# EAGLE board untitled (EAGLE 5.04)
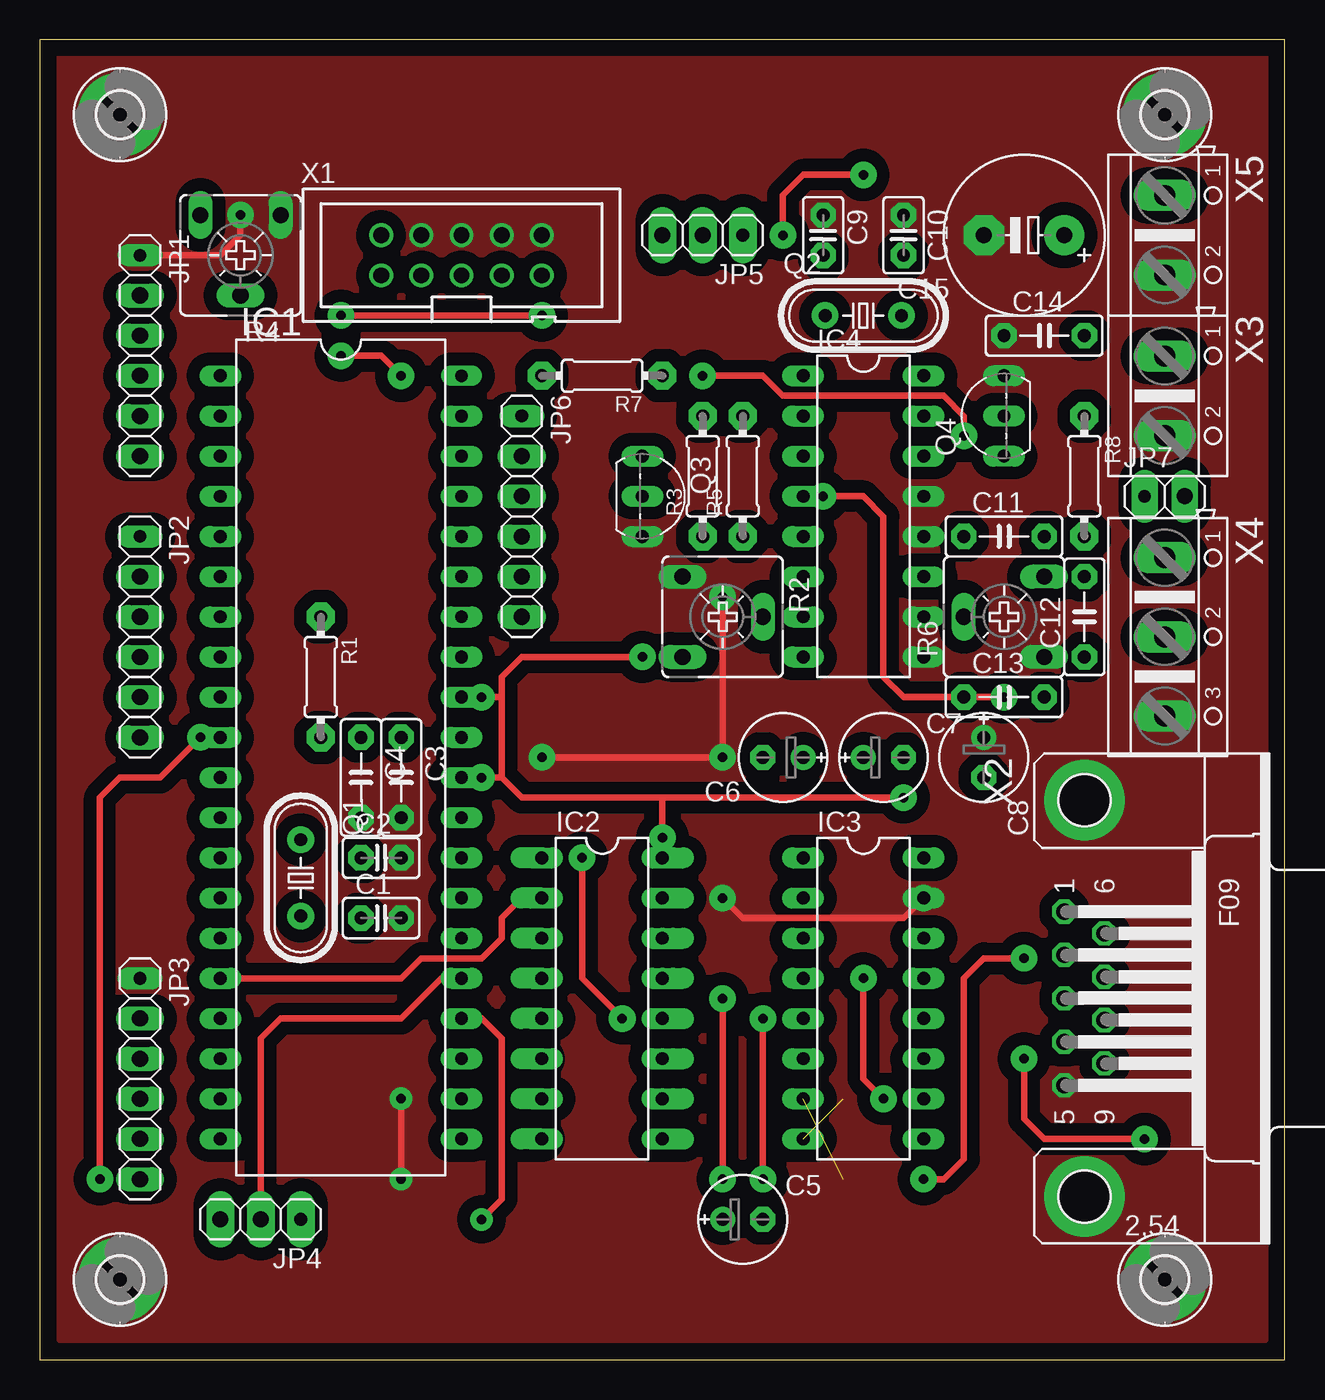
[diagram p0: board, top side]
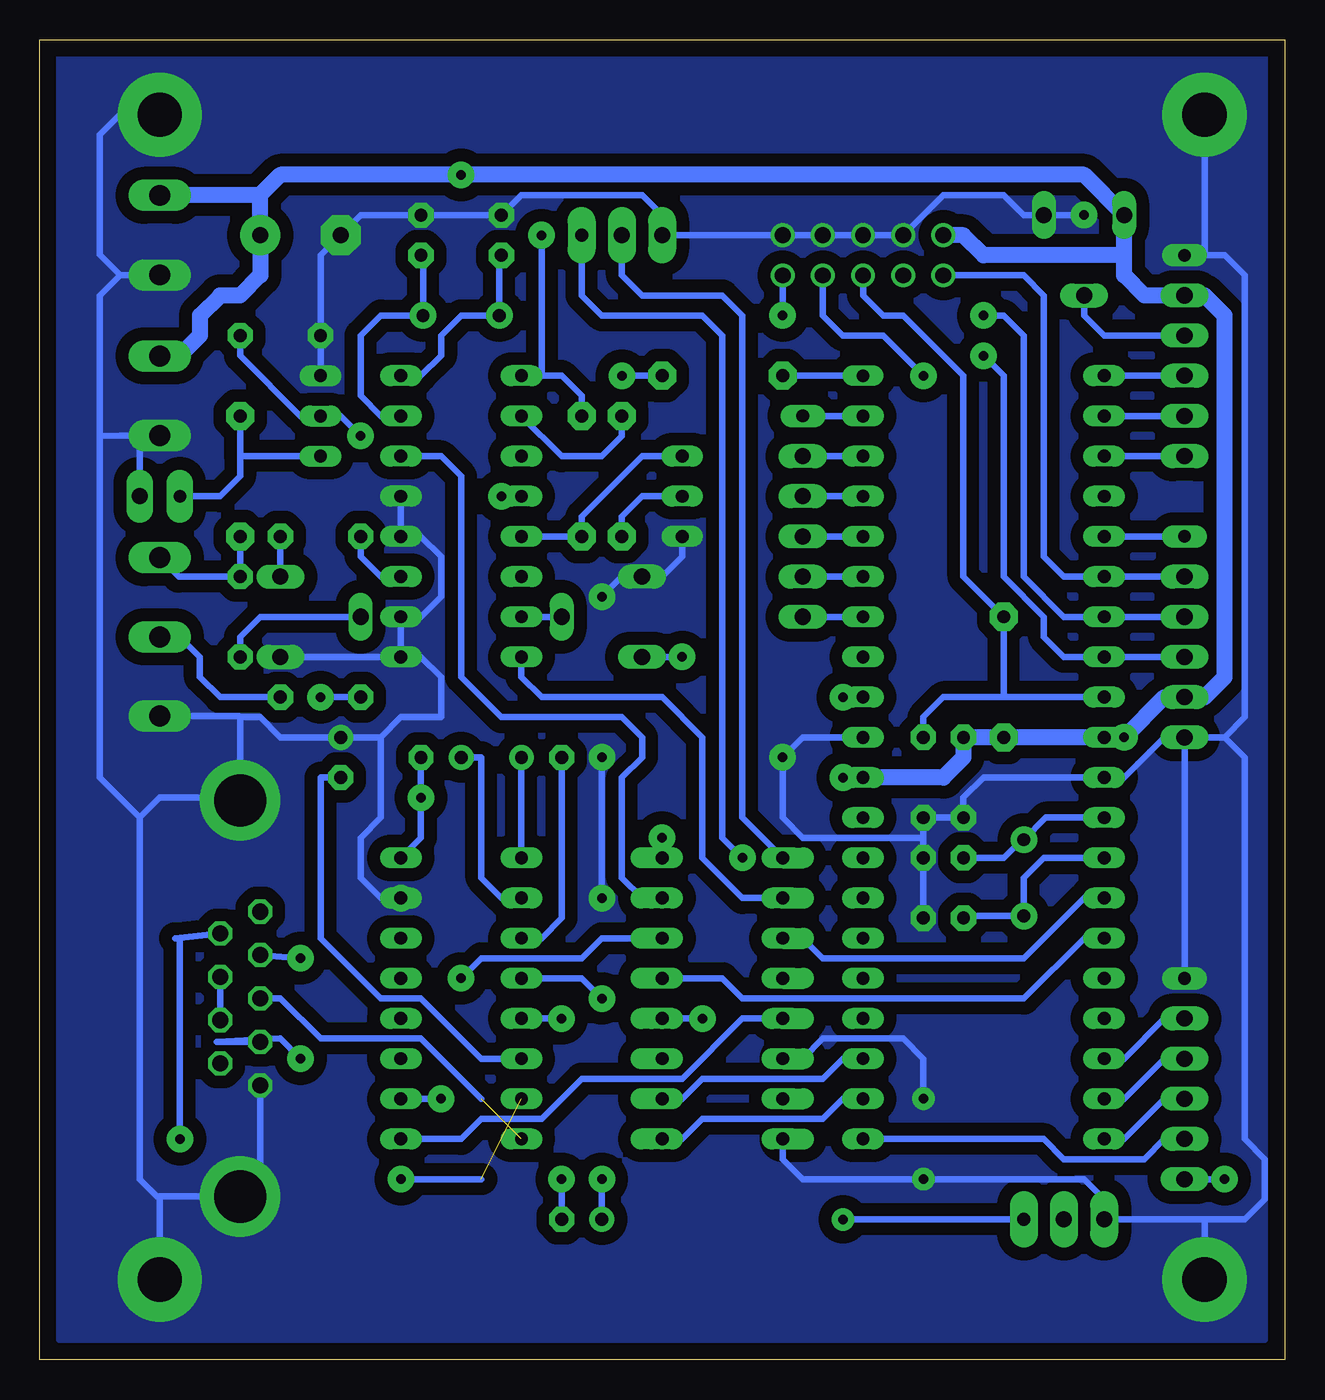
[diagram p1: board, bottom side, seen from below]

Size 78.72 x 83.49 mm. Coordinates in mm from the lower left corner, seen from the top.
Outline: 0,0 78.72,0 78.72,83.49 0,83.49 0,0
Copper layers (1*16): Top 0.035mm / dielectric 1.5mm / Bottom 0.035mm
Design rules "default": minimum track width 10mil, minimum drill 24mil, track to track 8mil, track to pad 8mil, pad to pad 8mil, via to via 8mil, smd to smd 8mil, copper to edge 40mil, drill to drill 8mil, minimum pad ring 10mil, minimum via ring 8mil, stop-mask expansion 4mil, vias tented up to drill 0mil, thermal gap 10mil

## Footprints (pad centres in the part's own frame; a part is rotated, then mirrored left to right if it is on the bottom)
C2.5-2 = drill 0.813 pad 1.6 octagon: 1 -1.27,0; 2 1.27,0
C5B2.5 = drill 0.813 pad 1.6 octagon: 1 -2.54,0; 2 2.54,0
E2,5-6E = drill 0.813 pad 1.575 round: + -1.27,0 | drill 0.813 pad 1.575 octagon: - 1.27,0
E5-10,5 = drill 1.016 pad 2.54 round: + -2.54,0 | drill 1.016 pad 2.54 octagon: - 2.54,0
2,8-PAD = drill 2.8 pad 5.334 round: B2,8 0,0
DIL40 = drill 0.813 long: 1 -24.13,-7.62; 2 -21.59,-7.62; 3 -19.05,-7.62; 4 -16.51,-7.62; 5 -13.97,-7.62; 6 -11.43,-7.62; 7 -8.89,-7.62; 8 -6.35,-7.62; 9 -3.81,-7.62; 10 -1.27,-7.62; 11 1.27,-7.62; 12 3.81,-7.62; 13 6.35,-7.62; 14 8.89,-7.62; 15 11.43,-7.62; 16 13.97,-7.62; 17 16.51,-7.62; 18 19.05,-7.62; 19 21.59,-7.62; 20 24.13,-7.62; 21 24.13,7.62; 22 21.59,7.62; 23 19.05,7.62; 24 16.51,7.62; 25 13.97,7.62; 26 11.43,7.62; 27 8.89,7.62; 28 6.35,7.62; 29 3.81,7.62; 30 1.27,7.62; 31 -1.27,7.62; 32 -3.81,7.62; 33 -6.35,7.62; 34 -8.89,7.62; 35 -11.43,7.62; 36 -13.97,7.62; 37 -16.51,7.62; 38 -19.05,7.62; 39 -21.59,7.62; 50 1.27,7.62 | drill 0.8 pad 1.27 long: 40 -24.13,7.62 | drill 0.813 pad 1.27 long: 41 -21.59,7.62; 42 -19.05,7.62; 43 -16.51,7.62; 44 -13.97,7.62; 45 -11.43,7.62; 46 -8.89,7.62; 47 -6.35,7.62; 48 -3.81,7.62; 49 -1.27,7.62; 51 1.27,7.62; 52 3.81,7.62; 53 6.35,7.62; 54 8.89,7.62; 55 11.43,7.62; 56 13.97,7.62; 57 16.51,7.62; 58 19.05,7.62; 59 21.59,7.62; 60 24.13,7.62; 61 -24.13,-7.62; 62 -21.59,-7.62; 63 -19.05,-7.62; 64 -16.51,-7.62; 65 -13.97,-7.62; 66 -11.43,-7.62; 67 -8.89,-7.62; 68 -6.35,-7.62; 69 -3.81,-7.62; 70 -1.27,-7.62; 71 1.27,-7.62; 72 3.81,-7.62; 73 6.35,-7.62; 74 8.89,-7.62; 75 11.43,-7.62; 76 13.97,-7.62; 77 16.51,-7.62; 78 19.05,-7.62; 79 21.59,-7.62; 80 24.13,-7.62; 81 24.13,-7.62
DIL16 = drill 0.813 long: 1 -8.89,-3.81; 2 -6.35,-3.81; 3 -3.81,-3.81; 4 -1.27,-3.81; 5 1.27,-3.81; 6 3.81,-3.81; 7 6.35,-3.81; 8 8.89,-3.81; 9 8.89,3.81; 10 6.35,3.81; 11 3.81,3.81; 12 1.27,3.81; 13 -1.27,3.81; 14 -3.81,3.81; 15 -6.35,3.81; 32 -8.89,3.81 | drill 0.813 offset: 16 -8.89,3.81; 17 -6.35,3.81; 18 -3.81,3.81; 19 -1.27,3.81; 20 1.27,3.81; 21 3.81,3.81; 22 6.35,3.81; 23 8.89,3.81; 24 8.89,-3.81; 25 8.89,-3.81; 26 6.35,-3.81; 27 3.81,-3.81; 28 1.27,-3.81; 29 -1.27,-3.81; 30 -3.81,-3.81; 31 -6.35,-3.81; 33 -8.89,-3.81
DIL16' = drill 0.813 long: 1 -8.89,-3.81; 2 -6.35,-3.81; 3 -3.81,-3.81; 4 -1.27,-3.81; 5 1.27,-3.81; 6 3.81,-3.81; 7 6.35,-3.81; 8 8.89,-3.81; 9 8.89,3.81; 10 6.35,3.81; 11 3.81,3.81; 12 1.27,3.81; 13 -1.27,3.81; 14 -3.81,3.81; 15 -6.35,3.81; 16 -8.89,3.81
1X06 = drill 0.8 pad 1.422 long: 1 -6.35,0; 7 -3.81,0; 8 -1.27,0; 9 1.27,0; 10 3.81,0; 11 6.35,0 | drill 1.016 long: 2 -3.81,0; 3 -1.27,0; 4 1.27,0; 5 3.81,0; 6 6.35,0
1X03 = drill 0.8 pad 1.778 long: 1 -2.54,0; 4 0,0; 5 2.54,0 | drill 1.016 long: 2 0,0; 3 2.54,0
1X02 = drill 0.8 pad 1.676 long: 1 -1.27,0; 3 1.27,0 | drill 1.016 long: 2 1.27,0
HC49/S = drill 0.813 pad 1.676 round: 1 -2.413,0; 2 2.413,0
TO92-EBC = drill 0.813 long: B 0,-1.27; C -2.54,-1.27; E 2.54,-1.27
0204/7 = drill 0.813 pad 1.778 octagon: 1 -3.81,0; 2 3.81,0
CA6V = drill 1.016 long: A -2.54,-2.54; E 2.54,-2.54; S 0,2.54
PAK100/2500-10 = drill 1 pad 1.422 round: 1 -5.08,-1.27; 2 -5.08,1.27; 3 -2.54,-1.27; 4 -2.54,1.27; 5 0,-1.27; 6 0,1.27; 7 2.54,-1.27; 8 2.54,1.27; 9 5.08,-1.27; 10 5.08,1.27
F09HP = drill 1.016 octagon: 1 -5.486,-1.27; 2 -2.743,-1.27; 3 0,-1.27; 4 2.743,-1.27; 5 5.486,-1.27; 6 -4.115,1.27; 7 -1.372,1.27; 8 1.372,1.27; 9 4.115,1.27 | drill 3.302 pad 5.08 round: G1 -12.522,0; G2 12.522,0
AK500/2 = drill 1.321 long: 1 -2.515,0; 2 2.515,0
AK500/3 = drill 1.321 long: 1 -5.004,0; 2 0,0; 3 5.004,0

## Placement (x,y rotation side)
C1  22p  [C2.5-2]  21.59,27.94 0 top
C2  22p  [C2.5-2]  21.59,31.75 0 top
C3  100n  [C5B2.5]  22.86,36.83 270 top
C4  100n  [C5B2.5]  20.32,36.83 270 top
C5  1u  [E2,5-6E]  44.45,8.89 0 top
C6  1u  [E2,5-6E]  46.99,38.1 180 top
C7  1u  [E2,5-6E]  53.34,38.1 0 top
C8  1u  [E2,5-6E]  59.69,38.1 270 top
C9  22p  [C2.5-2]  49.53,71.12 270 top
C10  22p  [C2.5-2]  54.61,71.12 270 top
C11  100n  [C5B2.5]  60.96,52.07 0 top
C12  100n  [C5B2.5]  66.04,46.99 90 top
C13  100n  [C5B2.5]  60.96,41.91 0 top
C14  100n  [C5B2.5]  63.5,64.77 0 top
C15  2200u  [E5-10,5]  62.23,71.12 180 top
H5  MOUNT-PAD-ROUND2.8  [2,8-PAD]  5.08,5.08 0 top
H6  MOUNT-PAD-ROUND2.8  [2,8-PAD]  71.12,5.08 0 top
H7  MOUNT-PAD-ROUND2.8  [2,8-PAD]  71.12,78.74 0 top
H8  MOUNT-PAD-ROUND2.8  [2,8-PAD]  5.08,78.74 0 top
IC1  MEGA32-P  [DIL40]  19.05,38.1 270 top
IC2  4052N  [DIL16]  35.56,22.86 270 top
IC3  MAX232  [DIL16']  52.07,22.86 270 top
IC4  [DIL16']  52.07,53.34 270 top
JP1  LCD_1  [1X06]  6.35,63.5 270 top
JP2  LCD_2  [1X06]  6.35,45.72 270 top
JP3  tombol_ext  [1X06]  6.35,17.78 270 top
JP4  ind_ext  [1X03]  13.97,8.89 180 top
JP5  USART_ext  [1X03]  41.91,71.12 180 top
JP6  sensor  [1X06]  30.48,53.34 270 top
JP7  [1X02]  71.12,54.61 0 top
Q1  11.0592  [HC49/S]  16.51,30.48 270 top
Q2  4,43  [HC49/S]  52.07,66.04 0 top
Q3  BC548  [TO92-EBC]  39.37,54.61 270 top
Q4  BC548  [TO92-EBC]  59.69,59.69 90 top
R1  10k  [0204/7]  17.78,43.18 270 top
R2  10k  [CA6V]  43.18,46.99 270 top
R3  10k  [0204/7]  41.91,55.88 90 top
R4  10k  [CA6V]  12.7,69.85 180 top
R5  10k  [0204/7]  44.45,55.88 90 top
R6  10k  [CA6V]  60.96,46.99 90 top
R7  10k  [0204/7]  35.56,62.23 180 top
R8  10k  [0204/7]  66.04,55.88 270 top
X1  ISP_port  [PAK100/2500-10]  26.67,69.85 0 top
X2  RS_232  [F09HP]  66.04,22.86 270 top
X3  [AK500/2]  71.12,60.96 270 top
X4  [AK500/3]  71.12,45.72 270 top
X5  [AK500/2]  71.12,71.12 270 top

## Library data of the parts
C1-C4 C9-C14 = capacitor-wima
C5-C8 C15 R1 R3 R5 R7 R8 = resistor
H5-H8 = holes
IC1 = atmel
IC2 = 40xx
IC3 = maxim
IC4 = ic-package
JP1-JP7 = pinhead
Q1 Q2 = crystal
Q3 Q4 = transistor-npn
R2 R4 R6 = pot
X1 = con-3m
X2 = con-subd
X3-X5 = con-ptr500

## Nets
!RST: C3.1 IC1.9 R1.1 X1.5
ADC0: IC1.39 JP6.1
ADC1: IC1.38 JP6.2
ADC2: IC1.37 JP6.3
ADC3: IC1.36 JP6.4
ADC4: IC1.35 JP6.5
ADC5: IC1.34 JP6.6
CONTR: JP1.3 R4.S
GND: C1.2 C2.2 C3.2 C4.2 C8.+ C9.1 C10.1 C14.1 C15.- H5.B2,8 H6.B2,8 H7.B2,8 H8.B2,8 IC1.11 IC1.31 IC2.6 IC2.8 IC3.15 IC4.9 IC4.10 IC4.12 IC4.13 JP1.1 JP2.6 JP3.1 JP4.3 JP5.3 JP7.2 Q3.E Q4.E R2.A R4.A R6.A X1.4 X1.6 X1.8 X1.10 X2.5 X2.G1 X2.G2 X3.2 X4.3 X5.2
IND0: IC1.25 JP4.2
IND1: IC1.24 JP4.1
LCD0: IC1.1 JP1.4
LCD1: IC1.2 JP1.5
LCD2: IC1.3 JP1.6
LCD4: IC1.5 JP2.1
LCD5: IC1.6 JP2.2 X1.1
LCD6: IC1.7 JP2.3 X1.9
LCD7: IC1.8 JP2.4 X1.7
N$1: IC3.8 X2.3
N$2: C5.- IC3.5
N$3: C2.1 IC1.12 Q1.1
N$4: C1.1 IC1.13 Q1.2
N$5: C5.+ IC3.4
N$6: C6.- IC3.3
N$7: C6.+ IC3.1
N$8: C7.+ IC3.2
N$9: C8.- IC3.6
N$10: IC3.7 X2.2
N$12: X2.4 X2.6
N$13: X2.7 X2.8
N$14: C9.2 IC4.16 Q2.1
N$15: C10.2 IC4.15 Q2.2
N$16: JP7.1 Q4.C R8.1
N$17: IC4.7 R2.S
N$18: IC4.2 R3.2
N$19: Q3.B R3.1
N$20: IC4.5 Q3.C R5.1
N$21: C13.2 X4.2
N$22: C13.1 IC4.4
N$23: C12.1 R6.S
N$24: C11.2 R6.E
N$25: C11.1 IC4.11
N$26: C12.2 R8.2 X4.1
N$27: IC1.40 R7.2
N$28: C14.2 Q4.B R7.1
RXD: IC1.14 IC2.3
RXM: IC1.16 IC2.2 IC4.8
RXRS: IC2.5 IC3.9
RXSN: IC2.1 JP5.2
SEL0: IC1.22 IC2.9
SEL1: IC1.23 IC2.10
TOMB0: IC1.18 JP3.2
TOMB1: IC1.19 JP3.3
TOMB2: IC1.20 JP3.4
TOMB3: IC1.21 JP3.5
TXD: IC1.15 IC2.13
TXM: IC2.15 IC4.14
TXRS: IC2.14 IC3.10
TXSN: IC2.12 JP5.1
VCC: C4.1 C7.- C15.+ IC1.10 IC1.30 IC1.32 IC2.16 IC3.16 IC4.1 JP1.2 JP2.5 JP3.6 R1.2 R2.E R4.E R5.2 X1.2 X3.1 X5.1
VEE: IC2.7

## Tracks (layer width: path | path; a pad name or v marks a point on that pad's centre or on a via)
!RST
  Bottom 0.406: IC1.9 17.78,41.91 | X1.5 26.67,67.31 25.4,66.04 24.13,66.04 20.32,62.23 20.32,49.53 R1.1 17.78,41.91 | 17.78,41.91 21.59,41.91 22.86,40.64 C3.1
ADC0
  Bottom 0.406: IC1.39 JP6.1
ADC1
  Bottom 0.406: IC1.38 JP6.2
ADC2
  Bottom 0.406: IC1.37 JP6.3
ADC3
  Bottom 0.406: IC1.36 JP6.4
ADC4
  Bottom 0.406: IC1.35 JP6.5
ADC5
  Bottom 0.406: IC1.34 JP6.6
CONTR
  Bottom 0.406: R4.S 12.7,66.04 11.43,64.77 JP1.3
GND  (via drill 0.6 pad 1.42, 0.6 pad 1.68)
  Top 0.406: JP1.1 11.43,69.85 12.7,71.12 v12.7,72.39 | IC3.15 54.61,27.94 44.45,27.94 v43.18,29.21 | v31.75,38.1 v43.18,38.1 v43.18,48.26 | v22.86,11.43 v22.86,16.51
  Bottom 0.406: JP2.6 7.62,39.37 10.16,36.83 IC1.11 19.05,36.83 20.32,35.56 C4.2 C3.2 22.86,33.02 | 5.08,69.85 3.81,69.85 2.54,68.58 2.54,40.64 3.81,39.37 | 5.08,69.85 JP1.1 | 3.81,39.37 JP2.6 | C1.2 C2.2 22.86,33.02 | JP2.6 JP3.1 | IC1.31 30.48,39.37 v31.75,38.1 31.75,34.29 30.48,33.02 22.86,33.02 | v43.18,38.1 v43.18,29.21 | 57.15,36.83 57.15,34.29 58.42,33.02 58.42,30.48 57.15,29.21 IC3.15 | 57.15,36.83 57.15,38.1 | 57.15,36.83 57.15,39.37 | 66.04,40.64 64.77,40.64 63.5,39.37 C8.+ 57.15,39.37 | 66.04,40.64 X2.G1 68.76,35.56 71.12,35.56 72.39,34.29 | 71.12,10.34 71.3,10.34 72.39,11.43 72.39,34.29 | 71.12,10.34 X2.G2 64.77,11.43 X2.5 | v12.7,72.39 R4.A 16.51,72.39 17.78,73.66 21.59,73.66 X1.4 X1.6 X1.8 X1.10 JP5.3 39.37,72.39 40.64,73.66 48.26,73.66 C9.1 C10.1 58.42,72.39 C15.- 60.96,69.85 C14.1 Q4.E | IC2.6 30.48,19.05 29.21,20.32 24.13,20.32 22.86,19.05 v22.86,16.51 | IC4.13 IC4.12 54.61,52.07 53.34,50.8 53.34,48.26 54.61,46.99 IC4.10 IC4.9 | IC4.9 54.61,44.45 53.34,43.18 53.34,40.64 55.88,40.64 57.15,39.37 | v43.18,48.26 41.91,49.53 R2.A 39.37,49.53 38.1,50.8 Q3.E | X4.3 66.12,40.72 66.04,40.64 | IC4.9 R6.A | 72.39,58.45 73.63,58.45 74.93,58.42 | 72.39,58.45 X3.2 | 74.93,58.42 74.93,36.83 72.39,34.29 | 73.63,68.6 X5.2 | 73.63,68.6 74.93,67.31 74.93,58.42 | 72.39,58.45 JP7.2 | IC2.8 31.75,12.7 30.48,11.43 v22.86,11.43 12.7,11.43 11.43,10.16 JP4.3 5.08,8.89 | 5.08,8.89 2.54,8.89 1.27,10.16 1.27,12.7 2.54,13.97 2.54,38.1 3.81,39.37 | H5.B2,8 5.08,8.89 | 5.08,69.85 H8.B2,8 | H7.B2,8 73.66,78.74 74.93,77.47 74.93,69.9 73.63,68.6 | H6.B2,8 71.12,10.34
  other vias: 55.88,29.21
  pour Bottom (isolate 0.813, no thermals): 77.47,82.55 77.47,1.27 1.27,1.27 1.27,82.55
  pour Top (isolate 0.813, no thermals): 1.27,82.55 77.47,82.55 77.47,1.27 1.27,1.27
IND0
  Top 0.406: IC1.25 25.4,24.13 22.86,21.59 15.24,21.59 13.97,20.32 JP4.2
IND1  (via drill 0.6 pad 1.42)
  Top 0.406: IC1.24 27.94,21.59 29.21,20.32 29.21,10.16 v27.94,8.89
  Bottom 0.406: JP4.1 v27.94,8.89
LCD0
  Bottom 0.406: JP1.4 IC1.1
LCD1
  Bottom 0.406: JP1.5 IC1.2
LCD2
  Bottom 0.406: JP1.6 IC1.3
LCD4
  Bottom 0.406: JP2.1 IC1.5
LCD5
  Bottom 0.406: JP2.2 IC1.6 13.97,49.53 15.24,50.8 15.24,67.31 16.51,68.58 X1.1
LCD6  (via drill 0.6 pad 1.68)
  Top 0.406: v19.05,66.04 v31.75,66.04
  Bottom 0.406: JP2.3 IC1.7 13.97,46.99 16.51,49.53 16.51,64.77 17.78,66.04 v19.05,66.04 | v31.75,66.04 X1.9
LCD7  (via drill 0.6 pad 1.68)
  Top 0.406: v19.05,63.5 21.59,63.5 v22.86,62.23
  Bottom 0.406: JP2.4 IC1.8 13.97,44.45 15.24,45.72 15.24,46.99 17.78,49.53 17.78,62.23 v19.05,63.5 | v22.86,62.23 25.4,64.77 27.94,64.77 29.21,66.04 X1.7
N$1  (1 unrouted)
  Bottom 0.406: X2.3 63.5,22.86 60.96,20.32 54.61,20.32 50.8,16.51
N$2  (via drill 0.6 pad 1.68)
  Top 0.406: v45.72,11.43 v45.72,21.59
  Bottom 0.406: v45.72,21.59 IC3.5 | C5.- v45.72,11.43
N$3
  Bottom 0.406: IC1.12 15.11,34.29 Q1.1 16.64,32.89 17.78,31.75 C2.1
N$4
  Bottom 0.406: IC1.13 15.24,31.75 16.51,30.48 Q1.2 20.19,28.07 C1.1
N$5  (via drill 0.6 pad 1.68)
  Top 0.406: v43.18,11.43 v43.18,22.86
  Bottom 0.406: IC3.4 44.45,24.13 v43.18,22.86 | C5.+ v43.18,11.43
N$6
  Bottom 0.406: C6.- 45.72,27.94 46.99,26.67 IC3.3
N$7
  Bottom 0.406: 48.26,33.02 IC3.1 C6.+
N$8
  Bottom 0.406: IC3.2 49.53,29.21 50.8,30.48 50.8,38.1 C7.+
N$9
  Bottom 0.406: IC3.6 50.8,19.05 54.61,22.86 57.15,22.86 60.96,26.67 60.96,36.83 C8.-
N$10  (via drill 0.6 pad 1.68)  (1 unrouted)
  Top 0.406: v62.23,25.4 59.69,25.4 58.42,24.13 58.42,12.7 57.15,11.43 v55.88,11.43
  Bottom 0.406: X2.2 64.97,25.6 v62.23,25.4 | 50.8,11.43 v55.88,11.43
N$12  (via drill 0.6 pad 1.68)
  Top 0.406: v62.23,19.05 62.23,15.24 63.5,13.97 v69.85,13.97
  Bottom 0.406: X2.4 67.51,20.12 63.5,20.32 v62.23,19.05 | v69.85,13.97 69.85,26.67 70.16,26.67 X2.6
N$13
  Bottom 0.406: X2.8 X2.7
N$14
  Bottom 0.406: IC4.16 54.61,62.23 53.34,63.5 53.34,64.77 52.07,66.04 Q2.1 49.66,69.72 C9.2
N$15
  Bottom 0.406: IC4.15 57.15,59.69 58.42,60.96 58.42,64.77 57.15,66.04 Q2.2 54.48,69.72 C10.2
N$16
  Bottom 0.406: Q4.C 66.04,57.15 | 66.04,57.15 R8.1 | 66.04,57.15 66.04,55.88 67.31,54.61 JP7.1
N$17
  Bottom 0.406: R2.S IC4.7
N$18
  Bottom 0.406: IC4.2 45.72,57.15 43.18,57.15 41.91,58.42 R3.2
N$19
  Bottom 0.406: Q3.B 40.64,54.61 41.91,53.34 R3.1
N$20
  Bottom 0.406: Q3.C 40.64,57.15 44.45,53.34 R5.1 IC4.5
N$21
  Bottom 0.406: C13.2 67.31,41.91 68.58,43.18 68.58,44.45 69.85,45.72 X4.2
N$22  (via drill 0.6 pad 1.68)
  Top 0.406: v49.53,54.61 52.07,54.61 53.34,53.34 53.34,43.18 54.61,41.91 v60.96,41.91
  Bottom 0.406: v49.53,54.61 IC4.4 | v60.96,41.91 C13.1
N$23
  Bottom 0.406: R6.S 64.77,46.99 66.04,45.72 C12.1
N$24
  Bottom 0.406: R6.E C11.2
N$25
  Bottom 0.406: IC4.11 57.15,49.53 58.42,50.8 C11.1
N$26
  Bottom 0.406: X4.1 69.93,49.53 C12.2 R8.2
N$27
  Bottom 0.406: IC1.40 R7.2
N$28  (via drill 0.6 pad 1.68)
  Top 0.406: v41.91,62.23 45.72,62.23 46.99,60.96 57.15,60.96 58.42,59.69 v58.42,58.42
  Bottom 0.406: R7.1 v41.91,62.23 | v58.42,58.42 59.69,59.69 Q4.B 62.23,59.69 66.04,63.5 C14.2
RXD
  Bottom 0.406: IC1.14 12.7,29.21 16.51,25.4 29.21,25.4 30.48,26.67 IC2.3
RXM
  Top 0.406: IC1.16 22.86,24.13 24.13,25.4 27.94,25.4 29.21,26.67 29.21,27.94 30.48,29.21 IC2.2
  Bottom 0.406: IC2.2 34.29,29.21 36.83,31.75 36.83,39.37 39.37,41.91 46.99,41.91 48.26,43.18 IC4.8
RXRS
  Bottom 0.406: IC2.5 34.29,21.59 38.1,17.78 44.45,17.78 46.99,15.24 50.8,15.24 52.07,13.97 IC3.9
RXSN
  Bottom 0.406: IC2.1 34.29,34.29 34.29,66.04 35.56,67.31 40.64,67.31 41.91,68.58 JP5.2
SEL0
  Bottom 0.406: IC1.22 27.94,16.51 29.21,15.24 36.83,15.24 38.1,13.97 IC2.9
SEL1
  Bottom 0.406: IC1.23 27.94,19.05 29.21,17.78 36.83,17.78 38.1,16.51 IC2.10
TOMB0
  Bottom 0.406: IC1.18 10.16,19.05 7.62,21.59 JP3.2
TOMB1
  Bottom 0.406: IC1.19 10.16,16.51 7.62,19.05 JP3.3
TOMB2
  Bottom 0.406: JP3.4 7.62,16.51 10.16,13.97 IC1.20
TOMB3
  Bottom 0.406: IC1.21 15.24,13.97 13.97,12.7 8.89,12.7 7.62,13.97 JP3.5
TXD
  Bottom 0.406: IC1.15 12.7,26.67 16.51,22.86 34.29,22.86 35.56,24.13 IC2.13
TXM
  Bottom 0.406: IC2.15 40.64,29.21 41.91,30.48 41.91,36.83 40.64,38.1 40.64,39.37 41.91,40.64 49.53,40.64 52.07,43.18 52.07,55.88 53.34,57.15 IC4.14
TXRS  (via drill 0.6 pad 1.68)
  Top 0.406: v53.34,16.51 52.07,17.78 v52.07,24.13
  Bottom 0.406: v52.07,24.13 50.8,25.4 44.45,25.4 43.18,26.67 IC2.14 | v53.34,16.51 IC3.10
TXSN  (via drill 0.6 pad 1.68)
  Top 0.406: v34.29,31.75 34.29,24.13 v36.83,21.59
  Bottom 0.406: JP5.1 44.45,67.31 43.18,66.04 36.83,66.04 35.56,64.77 35.56,33.02 v34.29,31.75 | v36.83,21.59 IC2.12
VCC  (via drill 0.6 pad 1.68)
  Top 0.406: 29.21,41.91 v27.94,41.91 | 29.21,36.83 29.21,41.91 | v27.94,36.83 29.21,36.83 | 29.21,41.91 29.21,43.18 30.48,44.45 v38.1,44.45 | 29.21,36.83 30.48,35.56 | 30.48,35.56 39.37,35.56 v39.37,33.02 | 30.48,35.56 v54.61,35.56 | v46.99,71.12 46.99,73.66 48.26,74.93 v52.07,74.93 | v3.81,11.43 3.81,35.56 5.08,36.83 7.62,36.83 v10.16,39.37
  Bottom 0.406: X5.1 71.12,73.66 | 46.99,62.23 IC4.1 | IC3.16 54.61,33.02 v54.61,35.56 C7.- | v27.94,41.91 IC1.32 | IC1.30 v27.94,36.83 | v38.1,44.45 R2.E | v39.37,33.02 IC2.16 | R5.2 44.45,60.96 45.72,62.23 46.99,62.23 | v46.99,71.12 46.99,62.23 | v3.81,11.43 JP3.6 | v10.16,39.37 IC1.10
  Bottom 1.016: 64.8,73.63 X5.1 | 64.8,73.63 63.5,74.93 v52.07,74.93 12.7,74.93 R4.E 10.16,69.85 | 10.16,69.85 10.16,68.58 8.89,67.31 JP1.2 5.08,67.31 3.81,66.04 3.81,43.18 5.08,41.91 JP2.5 7.62,41.91 v10.16,39.37 IC1.10 R1.2 C4.1 20.32,38.1 21.59,36.83 IC1.30 | X1.2 20.32,71.12 19.05,69.85 10.16,69.85 | 64.8,73.63 64.8,71.14 C15.+ 64.77,68.58 66.04,67.31 67.31,67.31 68.58,66.04 68.58,64.77 69.85,63.5 71.09,63.5 X3.1